# Altium PCB ESP32-Download-Motherboard.PcbDoc
Units mil, origin at the board's own origin, x right, y up, seen from the top; angles counter-clockwise.
Board outline 1697.5 x 1560 mil, 2 copper layers (Top Layer, Bottom Layer); 15 components, 17 nets, 119 pads, 319 vias.
Unrouted connection lines stored in the file: 11.
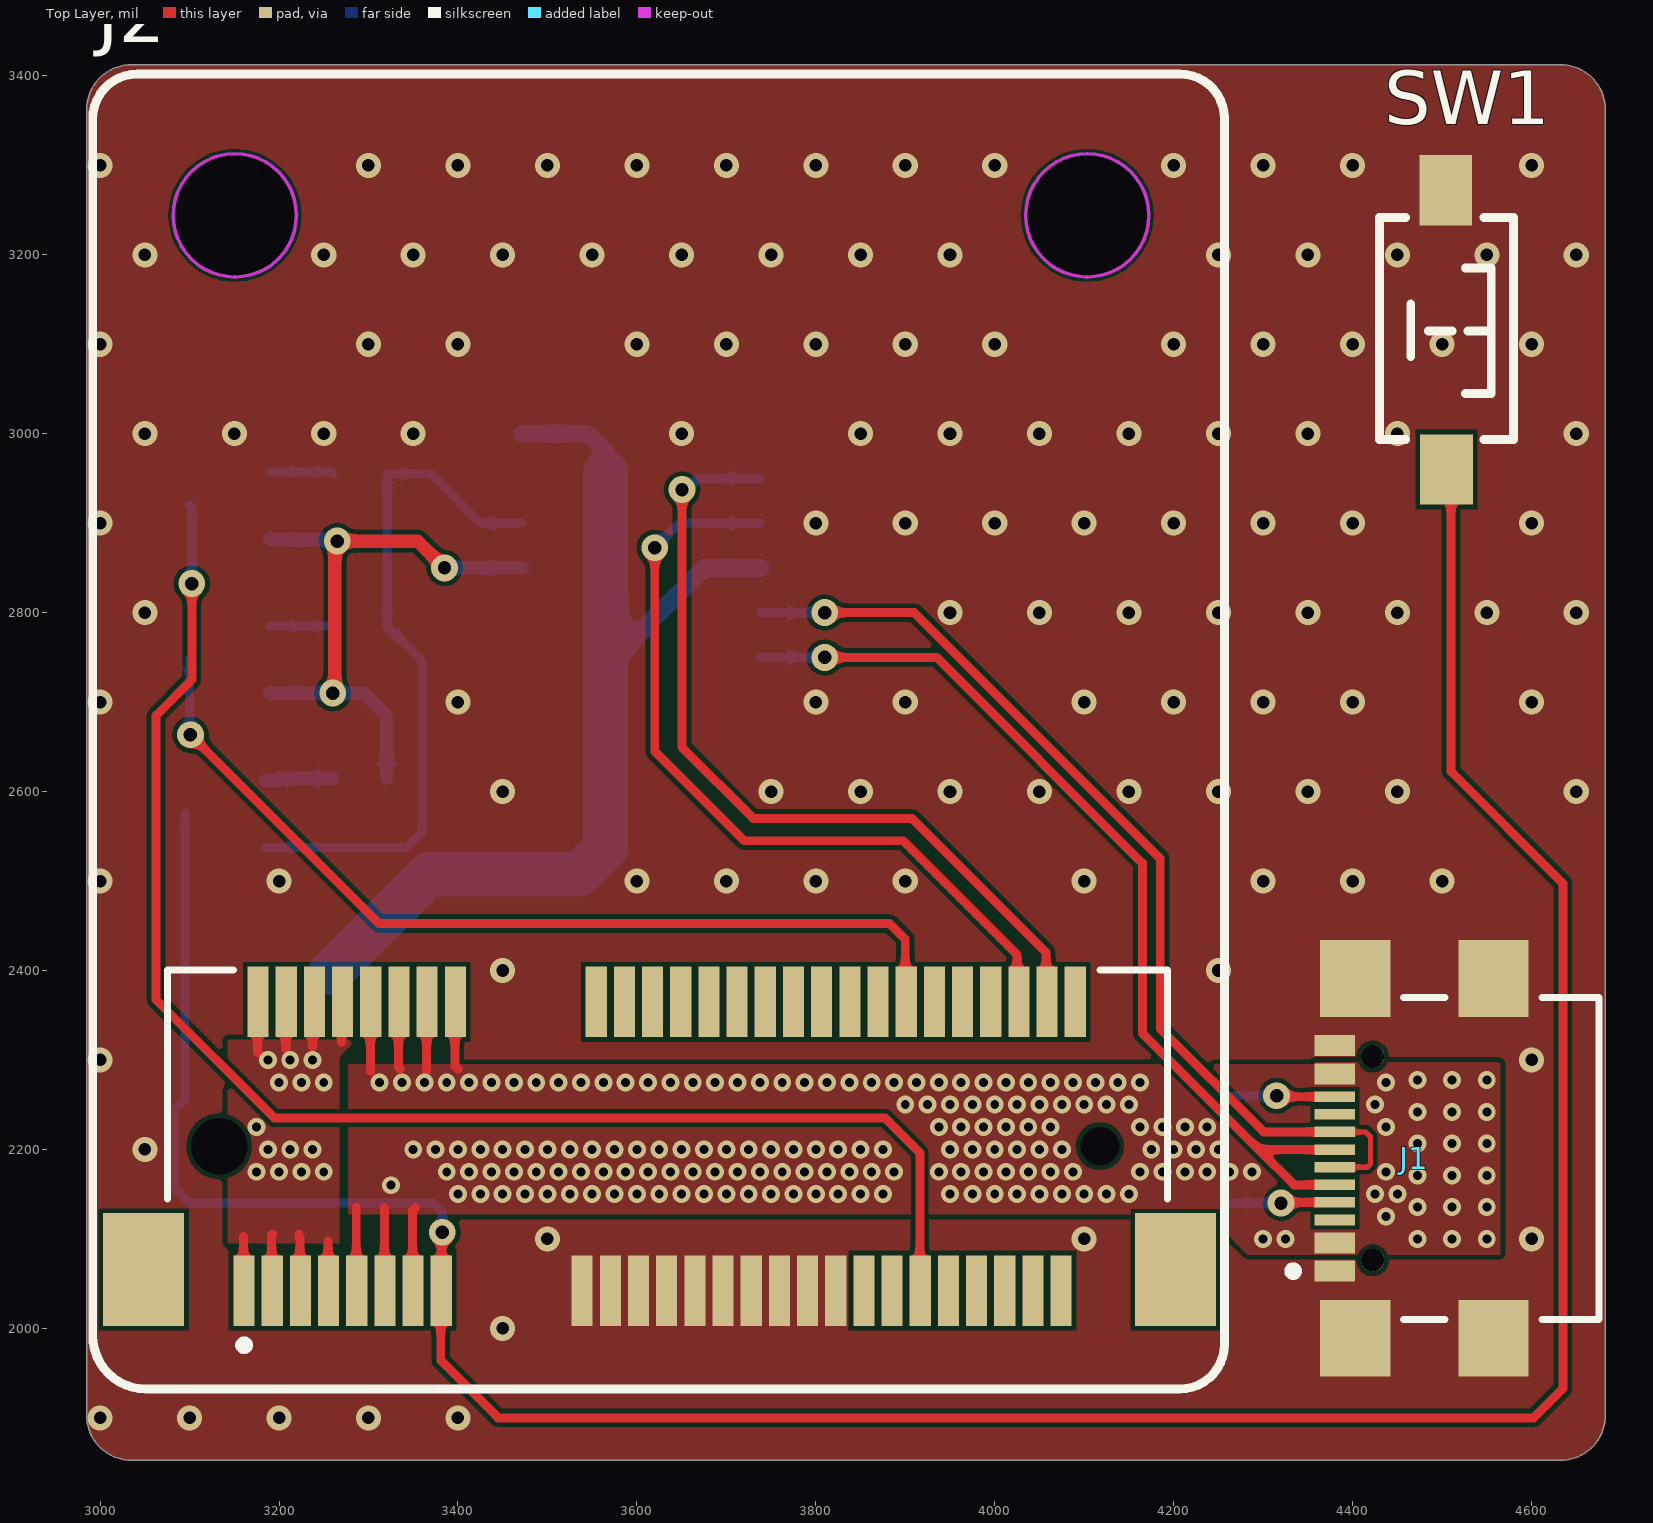
[diagram p0: Top Layer view]
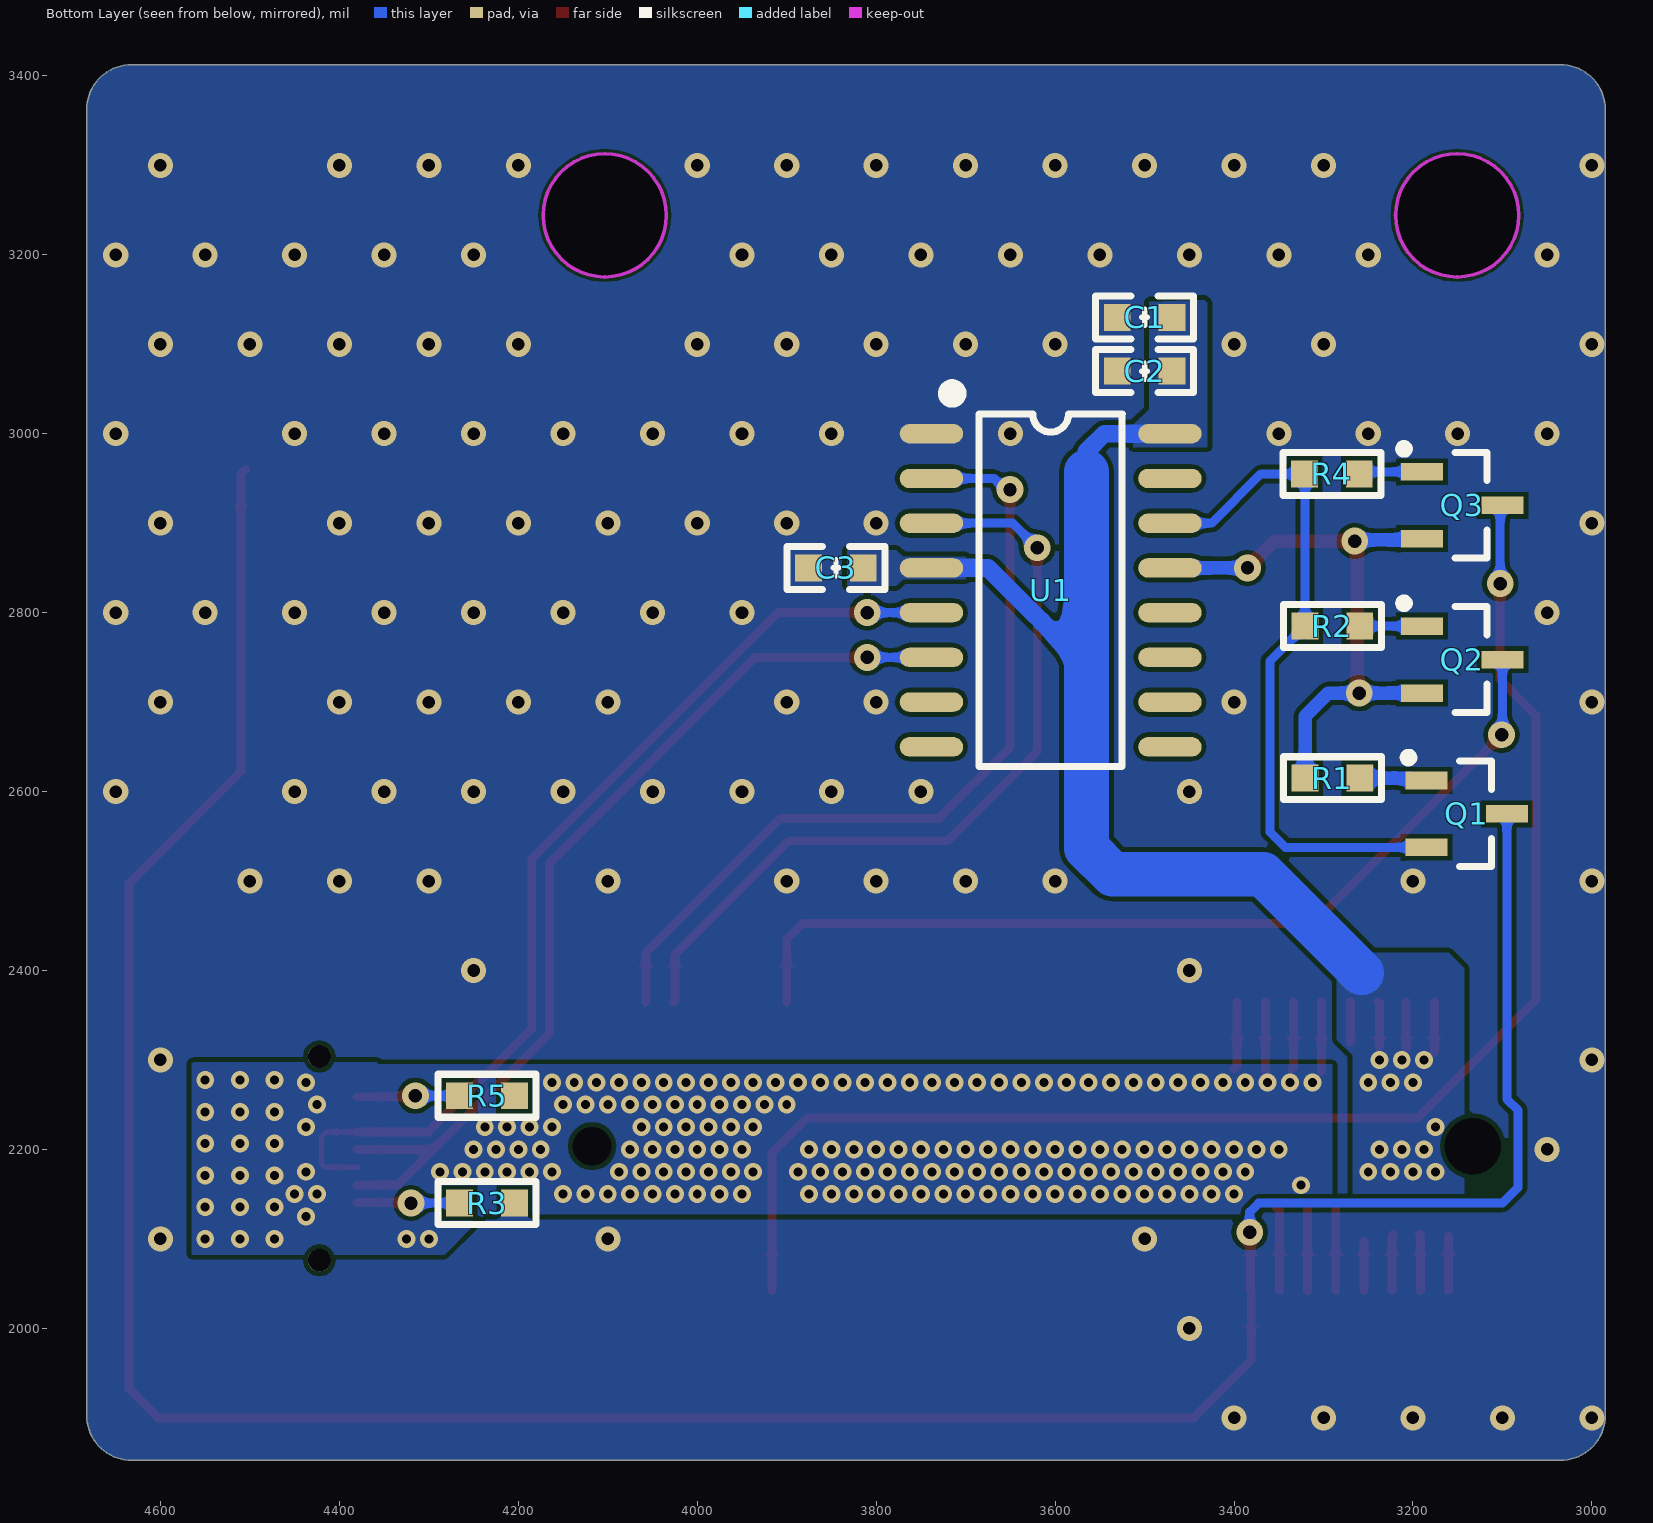
[diagram p1: Bottom Layer view, seen from below]
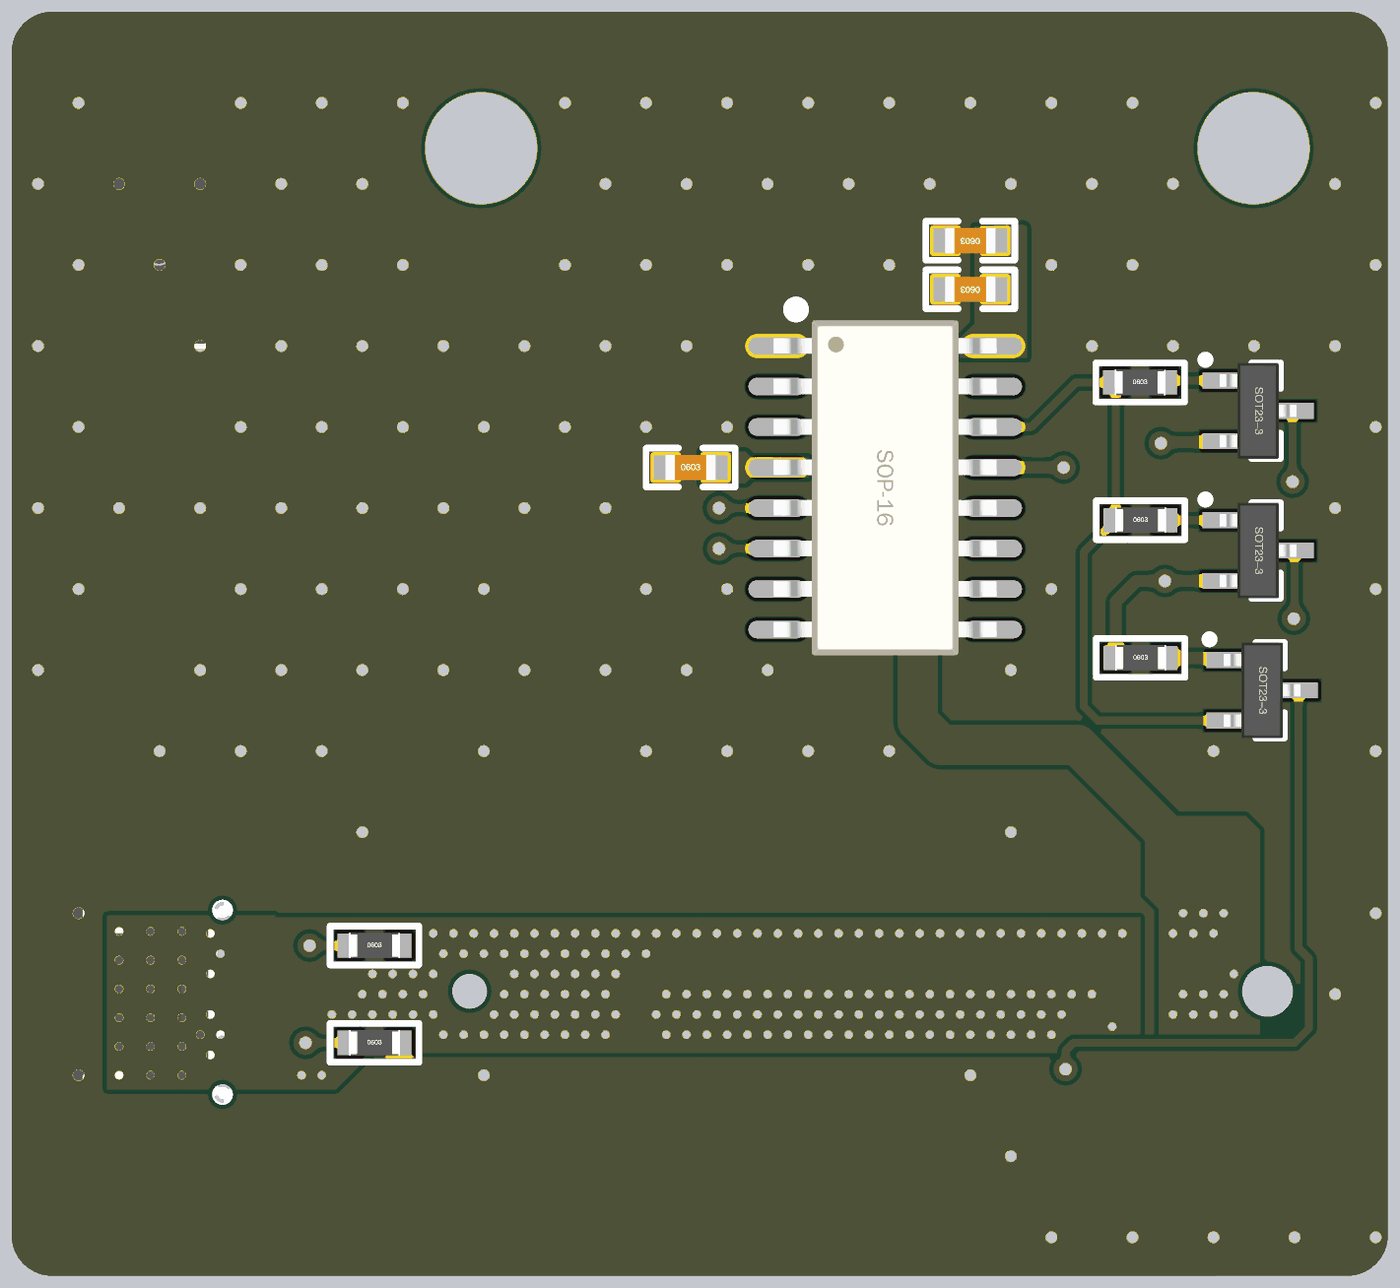
[diagram p2: 3D render of the assembled board from below, using the file's embedded part models]

## Layer stack, top to bottom
Top Solder: solder mask 0.4, Solder Resist, Dk 3.5
Top Layer: signal copper 1.4
Dielectric 1: dielectric 12.6, FR-4, Dk 4.8
Bottom Layer: signal copper 1.4
Bottom Solder: solder mask 0.4, Solder Resist, Dk 3.5

## Board outline
2985,1902.5 ccw(c3035,1902.5) 3035,1852.5 4632.5,1852.5 ccw(c4632.5,1902.5) 4682.5,1902.5 4682.5,3362.5 ccw(c4632.5,3362.5) 4632.5,3412.5 3035,3412.5 ccw(c3035,3362.5) 2985,3362.5

## Design rules (kind name [scope] priority, off if disabled: settings)
Clearance [All] p1: gap=5 ignorepadtopadclearanceinfootprint=FALSE except(0: Arc-Hole Track-Hole SMDPad-Hole THPad-Hole Via-Hole Fill-Hole Poly-Hole Region-Hole Text-Hole)
PolygonConnect [All] p1: connectstyle=Direct reliefconductorwidth=10 reliefentries=4 polygonreliefangle="90 Angle" airgapwidth=10
RoutingVias [All] p1: holewidth=28 width=50 viastyle="Through Hole" minholewidth=14 minwidth=28 maxholewidth=28 maxwidth=50
SolderMaskExpansion [All] p1: expansion=4
Width [All] p1: maxlimit=50 minlimit=6 preferedwidth=25 minimp=50.000000 maximp=50.000000 favimp=50.000000
30 further rules are at their usual default settings.

## Components (designator, comment, footprint, x,y, rotation, side; value= is the part's Value field where it differs from the comment)
C1 "0.1uF" "C 0603_L" 3500,3130 r0 bottom
C2 "10uF" "C 0603_L" 3500,3070 r0 bottom
C3 "0.1uF" "C 0603_L" 3845,2850 r180 bottom
J1 "USB4110-GF-A" FP-USB4110-GF-A-MFG 4525,2190 r90 top locked
J2 "MM60-52B1-E1-R650" MINI_PCIE_CONN_3130 3625.43,2647.87 r0 top
Q1 "SS8050" SOT23-3N 3140,2575 r270 bottom
Q2 "SS8050" SOT23-3N 3145,2747.5 r270 bottom
Q3 "SS8050" SOT23-3N 3145,2920 r270 bottom
R1 "1K" "R 0603_L" 3290,2615 r180 bottom
R2 "1K" "R 0603_L" 3290,2785 r180 bottom
R3 "5.1K" "R 0603_L" 4235,2140 r180 bottom
R4 "1K" "R 0603_L" 3290.59,2955 r180 bottom
R5 "5.1K" "R 0603_L" 4235,2260 r180 bottom
SW1 "3x6x5" "TSW SMD-3*6*2.5" 4505,3115 r270 top
U1 "CH340C" SOP16N_N 3605,2825 r180 bottom

## Footprints (in the part's own frame and the unit in brackets; to place one, negate y for a bottom-side part, rotate by r counter-clockwise, add the part's x,y. Pads: shape width x height; smd on the part's side, far side on the other; paste and mask are expansions set on the pad)
"C 0603_L" [mil] "无极性贴片电容"
  rect 30x30 smd: 1(-30.59,0) 2(30.59,0)
  silkscreen extent -55,-24 55,24, body extent -31,-16 31,16, height 32
FP-USB4110-GF-A-MFG [mm]
  rect 2.18x2 smd paste+0 mask+0: 1(-5.11,3.105) 2(5.11,3.105) 3(-5.11,-0.825) 4(5.11,-0.825)
  rect 0.6x1.15 smd paste+0 mask+0: A1-B12(-3.2,3.68) A4-B9(-2.4,3.68) B1-A12(3.2,3.68) B4-A9(2.4,3.68)
  rect 0.3x1.15 smd paste+0 mask+0: A5(-1.25,3.68) A6(-0.25,3.68) A7(0.25,3.68) A8(1.25,3.68) B5(1.75,3.68) B6(0.75,3.68) B7(-0.75,3.68) B8(-1.75,3.68)
  round 0.65 hole 0.65 unplated paste-1000 mask+0: ""(-2.89,2.605) ""(2.89,2.605)
  silkscreen extent -4.57,-3.83 4.57,4.99, body extent -6.3,-3.92 6.3,4.36, height 0.25
MINI_PCIE_CONN_3130 [mm]
  round 0 hole 3.5: 0(-12.06,15.143) 0(12.14,15.143)
  rect 0.6x2 smd: 1(-11.8,-15.385) 2(-11.4,-7.185) 3(-11,-15.385) 4(-10.6,-7.185) 5(-10.2,-15.385) 6(-9.8,-7.185) 7(-9.4,-15.385) 8(-9,-7.185) 9(-8.6,-15.385) 10(-8.2,-7.185) 11(-7.8,-15.385) 12(-7.4,-7.185) 13(-7,-15.385) 14(-6.6,-7.185) 15(-6.2,-15.385) 16(-5.8,-7.185) 17(-2.2,-15.385) 18(-1.8,-7.185) 19(-1.4,-15.385) 20(-1,-7.185) 21(-0.6,-15.385) 22(-0.2,-7.185) 23(0.2,-15.385) 24(0.6,-7.185) 25(1,-15.385) 26(1.4,-7.185) 27(1.8,-15.385) 28(2.2,-7.185) 29(2.6,-15.385) 30(3,-7.185) 31(3.4,-15.385) 32(3.8,-7.185) 33(4.2,-15.385) 34(4.6,-7.185) 35(5,-15.385) 36(5.4,-7.185) 37(5.8,-15.385) 38(6.2,-7.185) 39(6.6,-15.385) 40(7,-7.185) 41(7.4,-15.385) 42(7.8,-7.185) 43(8.2,-15.385) 44(8.6,-7.185) 45(9,-15.385) 46(9.4,-7.185) 47(9.8,-15.385) 48(10.2,-7.185) 49(10.6,-15.385) 50(11,-7.185) 51(11.4,-15.385) 52(11.8,-7.185)
  round 0 hole 1.6 unplated: MH1(-12.5,-11.285)
  round 0 hole 1.1 unplated: MH2(12.5,-11.285)
  rect 2.3x3.2 smd: MP1(-14.65,-14.785) MP2(14.65,-14.785)
  Keep-Out Layer circle w0.1: c12.14,15.143 r1.75
  Keep-Out Layer circle w0.1: c-12.06,15.143 r1.75
  silkscreen extent -16.09,-18.18 16.04,19.16, body extent -14.06,-16.07 14.34,-6.07, height 5.9
"R 0603_L" [mil] "1/10W贴片电阻"
  rect 30x30 smd: 1(-30.59,0) 2(30.59,0)
  silkscreen extent -55,-24 55,24, body extent -31,-16 31,16, height 16
SOP16N_N [mm] "10.3*7*1.8mm（长宽高）"
  oval 1.8x0.55 smd: 1(-3.385,4.445) 2(-3.385,3.175) 3(-3.385,1.905) 4(-3.385,0.635) 5(-3.385,-0.635) 6(-3.385,-1.905) 7(-3.385,-3.175) 8(-3.385,-4.445) 9(3.385,-4.445) 10(3.385,-3.175) 11(3.385,-1.905) 12(3.385,-0.635) 13(3.385,0.635) 14(3.385,1.905) 15(3.385,3.175) 16(3.385,4.445)
  silkscreen extent -2.95,-5 2.03,5.74, body extent -3.5,-5.25 3.5,5.25, height 1.9
SOT23-3N [mm] "3x1.3x1mm(长宽高)"
  rect 0.5x1.2 smd: 1(-0.95,-1.143) 2(0.95,-1.143) 3(0,1.143)
  silkscreen extent -1.72,-1.78 1.5,0.7, body extent -1.5,-1.2 1.5,1.2, height 1.05
"TSW SMD-3*6*2.5" [mm] "3*6*2.5mm"
  rect 2x1.5 smd: 1(-3.996,-0.02) 2(3.937,0)
  silkscreen extent -3.21,-1.9 3.09,1.9, body extent -4,-1.88 4,1.62, height 2.59

## Part data
C1 C2 C3: library part C, "无极性贴片电容"
J1: library part CMP-245163-000002-1, "CONN USB 2.0 TYPE-C R/A SMT", Current Rating=3/4.25/1.25/0.25A, Manufacturer=GCT, Package=0, Temperature="-40°C to +85°", Temperature Range High=+85°C, Temperature Range Low=-40°C, Voltage Rating=20V, Automotive=No, Category=Conn, ComponentLink2Description=Datasheet, ComponentLink2URL=https://gct.co/files/drawings/usb4110.pdf, Conn Orientation="Right Angle", Contact Material=Gold,Nickel, Device Class L1=Connectors, Device Class L2="USB Connectors", Device Class L3=unset, Digikey Description="CONN USB 2.0 TYPE-C R/A SMT", Height=3.46mm, Is Female=yes, Lead Free=Yes, Manufacturer Part Number=USB4110-GF-A, Number Of Contacts=16, Octopart=https://octopart.com/usb4110-gf-a-gct-103941985, RoHS=TRUE, Shielding=true, Standoff Height=0.1mm, Usb Standard="USB 2.0"
J2: library part MINI_PCIE_CONN, "Compatible with PCI Express Mini Card, 5.9 mm Height, -40 to 85 degC, 52-Pin SMD, RoHS, Tape and Reel", Color=-, Manufacturer="JAE Electronics", Operating Temperature=-40°C~85°C, Package Description="52-Pin Surface Mount Device, Body 28.4 x 10 mm, Pitch 0.8 mm", Package Reference=MM60-52B1, Package Version="Rev. 2, 01/2006", Standard Package=1, Associated Product=670-2277-2-ND-CONNMINIEXPRESSCARDLATCHSMD670-2277-1-ND-CONNMINIEXPRESSCARDLATCHSMD670-2277-6-ND-CONNMINIEXPRESSCARDLATCHSMD, Card Thickness="0.039\"(1.00mm)", Card Type=PCIExpressMiniCard, Catalog Drawings=MM60SeriesSideMM60SeriesTop, Category=Connectors,Interconnects, Contact Finish=Gold, Contact Finish Thickness=3.9μin(0.10μm), Contact Material=CopperAlloy, Contact Type=-, Datasheet URL=http://www.jae.com/z-en/pdf_download_exec.cfm?param=MB-0147-6E_MM60.pdf, Datasheet Version=04/2015, Family=CardEdgeConnectors-EdgeboardConnectors, Featured Product=MM60PCIeMiniCardConnector, Features=BoardGuide, Flange Feature=-, Gender=Female, Manufacturer Part Number=MM60-52B1-E1-R650, Manufacturer URL=http://www.jaeusa.com/, Material - Insulation=Thermoplastic, Mounting Technology=SurfaceMount, Mounting Type=SurfaceMount,RightAngle, Number of Positions=52, Number of Positions/Bay/Row=-, Number of Rows=2, Online Catalog=MM60Series, Other Names=670-2275-6, Other Related Documents=CardSelectionGuide, Package URL=https://datasheet.ciiva.com/7633/332207-7633323.pdf, Packaging=Digi-Reel?, Pitch="0.031\"(0.80mm)", Product Training Modules=MM60PCIeMiniCardConnectorMemoryModules,theSM3andMM60SeriesofConnectors, Read Out=Dual, Series=MM60, Termination=Solder
Q1 Q2 Q3: library part 8050-SMD, "高频放大-NPN型", BOM名称=高频放大, 属性="40V 1.5A 1W 100MH"
R1 R2 R3 R4 R5: library part R, "贴片电阻"
SW1: library part "TSW 3x6", "3x6轻触开关", BOM名称=3x6Çá´

## Via types
v1: diameter 20, hole 10, Top Layer to Bottom Layer, tented both sides, 193 vias
v2: diameter 28, hole 14, Top Layer to Bottom Layer, tented both sides, 114 vias
v3: diameter 30, hole 15, Top Layer to Bottom Layer, tented both sides, 12 vias

## Nets (pads, with @x,y where several pads share a name; then routed paths per layer and width w, separated by ;. In a path a pad name is that pad's centre, name@x,y a point inside that pad or via, vN(x,y) a via of type N, cw(c..) or ccw(c..) an arc to the next point about the centre after c; other vN are vias at no path point)
+3.3: C1.1 C2.1 C3.2 J2.1 J2.2 J2.3 J2.4 J2.5 J2.6 J2.7 J2.8 U1.4 U1.16 | length 1577.5
  Top Layer w10: 3160,2102.5 3160.31,2102.19 J2.1@3160.31,2042.17 ; J2.2@3176.06,2365 3176.06,2308.94 3177.5,2307.5 ; J2.3@3191.81,2042.17 3191.81,2104.31 3192.5,2105 ; 3207.5,2312.5 3207.56,2312.56 J2.4@3207.56,2365 ; 3222.5,2105 3222.5,2102.5 3223.31,2101.69 J2.5@3223.31,2042.17 ; 3237.5,2315 3237.5,2363.45 J2.6@3239.05,2365 ; J2.7@3254.8,2042.17 3254.8,2097.3 3255,2097.5 ; 3270,2320 3270,2364.45 J2.8@3270.55,2365
  Bottom Layer w20: U1.16 3545,3000 3565,2980 3565,2957.5 ; 3565,2740 3675,2850 U1.4
  Bottom Layer w50: 3257.5,2397.5 3367.5,2507.5 3535.71,2507.5 3565,2536.79 3565,2740 3565,2957.5
  other v1: 3175,2175 3200,2175 3225,2175 3250,2175 3187.5,2200 3212.5,2200 3237.5,2200 3175,2225 3200,2275 3225,2275 3250,2275 3187.5,2300 3212.5,2300 3237.5,2300
+5: J1.A4-B9 J1.B4-A9 J2.9 J2.10 J2.11 J2.12 J2.13 J2.14 J2.16 | length 588.1
  Top Layer w10: J2.9@3286.3,2042.17 3286.3,2135.9 ; J2.10@3302.05,2365 3302.05,2287.95 3302.5,2287.5 ; 3317.5,2135 3317.8,2134.7 J2.11@3317.8,2042.17 ; J2.12@3333.54,2365 3333.54,2291.46 3335,2290 ; J2.13@3349.29,2042.17 3349.29,2131.79 3352.5,2135 ; 3365,2287.5 3365.04,2287.54 J2.14@3365.04,2365 ; J2.16@3396.54,2365 3396.54,2293.46 3400,2290
  other v1: 4300,2100 4325,2100 4472.5,2100 4511.25,2100 4550,2100 4437.5,2125 4472.5,2135.5 4511.25,2135.5 4550,2135.5 3400,2150 3425,2150 3450,2150 3475,2150 3500,2150 3525,2150 3550,2150 3575,2150 3600,2150 3625,2150 3650,2150 3675,2150 3700,2150 3725,2150 3750,2150 3775,2150 3800,2150 3825,2150 3850,2150 3875,2150 3950,2150 3975,2150 4000,2150 4025,2150 4050,2150 4075,2150 4100,2150 4125,2150 4150,2150 4425,2150 4450,2150 3325,2160 4472.5,2171 4511.25,2171 4550,2171 3387.5,2175 3412.5,2175 3437.5,2175 3462.5,2175 3487.5,2175 3512.5,2175 3537.5,2175 3562.5,2175 3587.5,2175 3612.5,2175 3637.5,2175 3662.5,2175 3687.5,2175 3712.5,2175 3737.5,2175 3762.5,2175 3787.5,2175 3812.5,2175 3837.5,2175 3862.5,2175 3887.5,2175 3937.5,2175 3962.5,2175 3987.5,2175 4012.5,2175 4037.5,2175 4062.5,2175 4087.5,2175 4162.5,2175 4187.5,2175 4212.5,2175 4237.5,2175 4262.5,2175 4287.5,2175 4437.5,2175 3350,2200 3375,2200 3400,2200 3425,2200 3450,2200 3475,2200 3500,2200 3525,2200 3550,2200 3575,2200 3600,2200 3625,2200 3650,2200 3675,2200 3700,2200 3725,2200 3750,2200 3775,2200 3800,2200 3825,2200 3850,2200 3875,2200 3950,2200 3975,2200 4000,2200 4025,2200 4050,2200 4075,2200 4175,2200 4200,2200 4225,2200 4250,2200 4472.5,2206.5 4511.25,2206.5 4550,2206.5 3937.5,2225 3962.5,2225 3987.5,2225 4012.5,2225 4037.5,2225 4062.5,2225 4162.5,2225 4187.5,2225 4212.5,2225 4237.5,2225 4437.5,2225 4472.5,2242 4511.25,2242 4550,2242 3900,2250 3925,2250 3950,2250 3975,2250 4000,2250 4025,2250 4050,2250 4075,2250 4100,2250 4125,2250 4150,2250 4425,2250 3312.5,2275 3337.5,2275 3362.5,2275 3387.5,2275 3412.5,2275 3437.5,2275 3462.5,2275 3487.5,2275 3512.5,2275 3537.5,2275 3562.5,2275 3587.5,2275 3612.5,2275 3637.5,2275 3662.5,2275 3687.5,2275 3712.5,2275 3737.5,2275 3762.5,2275 3787.5,2275 3812.5,2275 3837.5,2275 3862.5,2275 3887.5,2275 3912.5,2275 3937.5,2275 3962.5,2275 3987.5,2275 4012.5,2275 4037.5,2275 4062.5,2275 4087.5,2275 4112.5,2275 4137.5,2275 4162.5,2275 4437.5,2275 4472.5,2277.5 4511.25,2277.5 4550,2277.5
D+: J1.A6 J1.B6 U1.5 | length 1110.2
  Top Layer w6: J1.A6 4416.49,2180.16 4420,2183.67 4420,2214.05 4414.53,2219.53 J1.B6 J1.B6@4382.08,2217.57
  Top Layer w10: v3(3810,2800) 3910,2800 4185,2525 4185,2335 4300.47,2219.53 J1.B6
  Bottom Layer w10: U1.5 v3(3810,2800)
D-: J1.A7 J1.B7 U1.6 | length 1082.3
  Top Layer w10: v3(3810,2750) 3935,2750 4165,2520 4165,2330 4295.16,2199.84 ; J1.B7 4334.53,2160.47 4295.16,2199.84 ; J1.A7 4295.16,2199.84
  Bottom Layer w10: U1.6 v3(3810,2750)
DTR: Q2.2 Q3.2 R1.1 U1.13 | length 677.9
  Top Layer w15: v3(3260,2710) 3262.5,2712.5 3262.5,2877.5 v3(3265,2880) 3355,2880 v3(3385,2850)
  Bottom Layer w15: Q2.2 3190.05,2710.05 v3(3260,2710) v3(3260,2710) 3295,2710 3320.59,2684.41 R1.1 ; Q3.2 3191.3,2881.3 3263.7,2881.3 v3(3265,2880) ; v3(3385,2850) U1.13
EN: J2.15 Q1.3 SW1.2 | length 3276.2
  Top Layer w10: v3(3382.5,2107.5) 3381.64,2106.64 3381.64,2043.02 3380.79,2042.17 3380.79,1964.21 3445,1900 4602.5,1900 4635,1932.5 4635,2497.5 4510,2622.5 4510,2955 SW1.2
  Bottom Layer w10: Q1.3 3095,2256.25 3082.5,2243.75 3082.5,2157.5 3100,2140 3372.5,2140 3382.5,2130 v3(3382.5,2107.5)
GND: C1.2 C2.2 C3.1 J1.1 J1.2 J1.3 J1.4 J1.A1-B12 J1.B1-A12 J2.17 J2.19 J2.21 J2.23 J2.25 J2.27 J2.29 J2.31 J2.33 J2.35 R3.2 R5.2 SW1.1 U1.1
  other v2: 3000,1900 3100,1900 3200,1900 3300,1900 3400,1900 3450,2000 3500,2100 4100,2100 4600,2100 3050,2200 3000,2300 4600,2300 3450,2400 4250,2400 3000,2500 3200,2500 3600,2500 3700,2500 3800,2500 3900,2500 4100,2500 4300,2500 4400,2500 4500,2500 3450,2600 3750,2600 3850,2600 3950,2600 4050,2600 4150,2600 4250,2600 4350,2600 4450,2600 4650,2600 3000,2700 3400,2700 3800,2700 3900,2700 4100,2700 4200,2700 4300,2700 4400,2700 4600,2700 3050,2800 3950,2800 4050,2800 4150,2800 4250,2800 4350,2800 4450,2800 4550,2800 4650,2800 3000,2900 3800,2900 3900,2900 4000,2900 4100,2900 4200,2900 4300,2900 4400,2900 4600,2900 3050,3000 3150,3000 3250,3000 3350,3000 3650,3000 3850,3000 3950,3000 4050,3000 4150,3000 4250,3000 4350,3000 4450,3000 4650,3000 3000,3100 3300,3100 3400,3100 3600,3100 3700,3100 3800,3100 3900,3100 4000,3100 4200,3100 4300,3100 4400,3100 4500,3100 4600,3100 3050,3200 3250,3200 3350,3200 3450,3200 3550,3200 3650,3200 3750,3200 3850,3200 3950,3200 4250,3200 4350,3200 4450,3200 4550,3200 4650,3200 3000,3300 3300,3300 3400,3300 3500,3300 3600,3300 3700,3300 3800,3300 3900,3300 4000,3300 4200,3300 4300,3300 4400,3300 4600,3300
IO0: J2.41 Q3.3 | length 1648.9
  Top Layer w10: v3(3102.5,2832.5) 3102.5,2725 3062.5,2685 3062.5,2367.5 3195,2235 3877.5,2235 3916.22,2196.28 J2.41@3916.22,2042.17
  Bottom Layer w10: Q3.3 3102.5,2917.5 v3(3102.5,2832.5)
IO2: J2.40 Q2.3 | length 1048.3
  Top Layer w10: v3(3100.95,2663.47) 3311.93,2452.5 3882.5,2452.5 3900,2435 3900,2365.47 J2.40@3900.47,2365
  Bottom Layer w10: Q2.3 3100,2664.43 v3(3100.95,2663.47)
NetJ1_A5: J1.A5 R3.1 | length 114.9
  Top Layer w10: v3(4320,2140) 4320.79,2140.79 J1.A5
  Bottom Layer w10: R3.1 v3(4320,2140)
NetJ1_B5: J1.B5 R5.1 | length 115
  Top Layer w10: v3(4315,2260) 4316.1,2258.9 J1.B5
  Bottom Layer w10: R5.1 v3(4315,2260)
NetQ1_1: Q1.1 R1.2 | length 75.5
  Bottom Layer w15: Q1.1 3198.78,2612.4 3201.38,2615 R1.2
NetQ2_1: Q2.1 R2.2 | length 69.5
  Bottom Layer w10: Q2.1 3259.31,2784.9 R2.2
NetQ3_1: Q3.1 R4.2 | length 71
  Bottom Layer w10: Q3.1 3257.6,2957.4 R4.2
RTS: Q1.2 R2.1 R4.1 U1.14 | length 772.1
  Bottom Layer w10: Q1.2 3342.6,2537.6 3360,2555 3360,2745.59 R2.1 3320.59,2954.41 R4.1 3370,2955 3425,2900 U1.14
RXD: J2.50 U1.2 | length 938.3
  Top Layer w10: v3(3650.41,2937.5) 3650.41,2649.59 3730,2570 3907.5,2570 4057.5,2420 4057.5,2365.45 J2.50@4057.95,2365
  Bottom Layer w10: v3(3650.41,2937.5) 3655.82,2937.5 3668.32,2950 U1.2
TXD: J2.48 U1.3 | length 909.5
  Top Layer w10: v3(3620,2872.5) 3620,2645 3720,2545 3897.5,2545 4025,2417.5 4025,2366.46 J2.48@4026.46,2365
  Bottom Layer w10: v3(3620,2872.5) 3647.5,2900 U1.3
pads on no net: J1. J1.A8 J1.B8 J2.0 J2.18 J2.20 J2.22 J2.24 J2.26 J2.28 J2.30 J2.32 J2.34 J2.36 J2.37 J2.38 J2.39 J2.42 J2.43 J2.44 J2.45 J2.46 J2.47 J2.49 J2.51 J2.52 J2.MH1 J2.MH2 J2.MP1 J2.MP2 U1.7 U1.8 U1.9 U1.10 U1.11 U1.12 U1.15

## Polygon pours and split planes (outlines as drawn)
GND on Bottom Layer "GND_L02_P009" (solid, pour order 9): 2985,1902.5 ccw(c3035,1902.5) 3035,1852.5 4632.5,1852.5 ccw(c4632.5,1902.5) 4682.5,1902.5 4682.5,3362.5 ccw(c4632.5,3362.5) 4632.5,3412.5 3035,3412.5 ccw(c3035,3362.5) 2985,3362.5
+3.3 on Bottom Layer "+3.3_L02_P006" (solid, pour order 6): 3267.5,2150 3267.5,2305 3285,2322.5 3285,2420 3160,2420 3142.5,2402.5 3142.5,2150
+5 on Bottom Layer "+5_L02_P003" (solid, pour order 3): 4375,2295 3290,2295 3290,2127.5 4237.5,2127.5 4282.5,2082.5 4565,2082.5 4565,2295 4562.5,2297.5
+3.3 on Bottom Layer "+3.3_L02_P007" (solid, pour order 7): 3495,3147.5 3495,3027.5 3512.5,3010 3512.5,2985 3430,2985 3430,3150
+5 on Bottom Layer "+5_L02_P002" (solid, pour order 2): 4357.5,2082.5 4565,2082.5 4565,2300 4562.5,2297.5 4357.5,2297.5 4357.5,2272.5 4447.5,2272.5 4447.5,2107.5 4357.5,2107.5
+3.3 on Bottom Layer "+3.3_L02_P000" (solid, pour order 0): 3832.5,2870 3777.5,2870 3770,2862.5 3700,2862.5 3700,2837.5 3770,2837.5 3777.5,2830 3832.5,2830
GND on Top Layer "GND_L01_P008" (solid, pour order 8): 2985,1902.5 ccw(c3035,1902.5) 3035,1852.5 4632.5,1852.5 ccw(c4632.5,1902.5) 4682.5,1902.5 4682.5,3362.5 ccw(c4632.5,3362.5) 4632.5,3412.5 3035,3412.5 ccw(c3035,3362.5) 2985,3362.5
+3.3 on Top Layer "+3.3_L01_P005" (solid, pour order 5): 3267.5,2095 3267.5,2302.5 3285,2322.5 3142.5,2322.5 3142.5,2095
+5 on Top Layer "+5_L01_P004" (solid, pour order 4): 4375,2295 3277.5,2295 3277.5,2127.5 4237.5,2127.5 4282.5,2082.5 4565,2082.5 4565,2295 4562.5,2297.5
+5 on Top Layer "+5_L01_P001" (solid, pour order 1): 4357.5,2082.5 4565,2082.5 4565,2300 4562.5,2297.5 4357.5,2297.5 4357.5,2272.5 4447.5,2272.5 4447.5,2107.5 4357.5,2107.5

## Silkscreen, mask and mechanical layers (free items; w line width, h text height)
Mechanical 1:
  the board outline again, w10